# Altium PCB breakout_arduino.PcbDoc
Units mm, origin at the board's own origin, x right, y up, seen from the top; angles counter-clockwise.
Board outline 68.54 x 53.38 mm, 2 copper layers (Top Layer, Bottom Layer), stack 0.325 mm thick; 12 components, 56 nets, 145 pads, 93 vias.
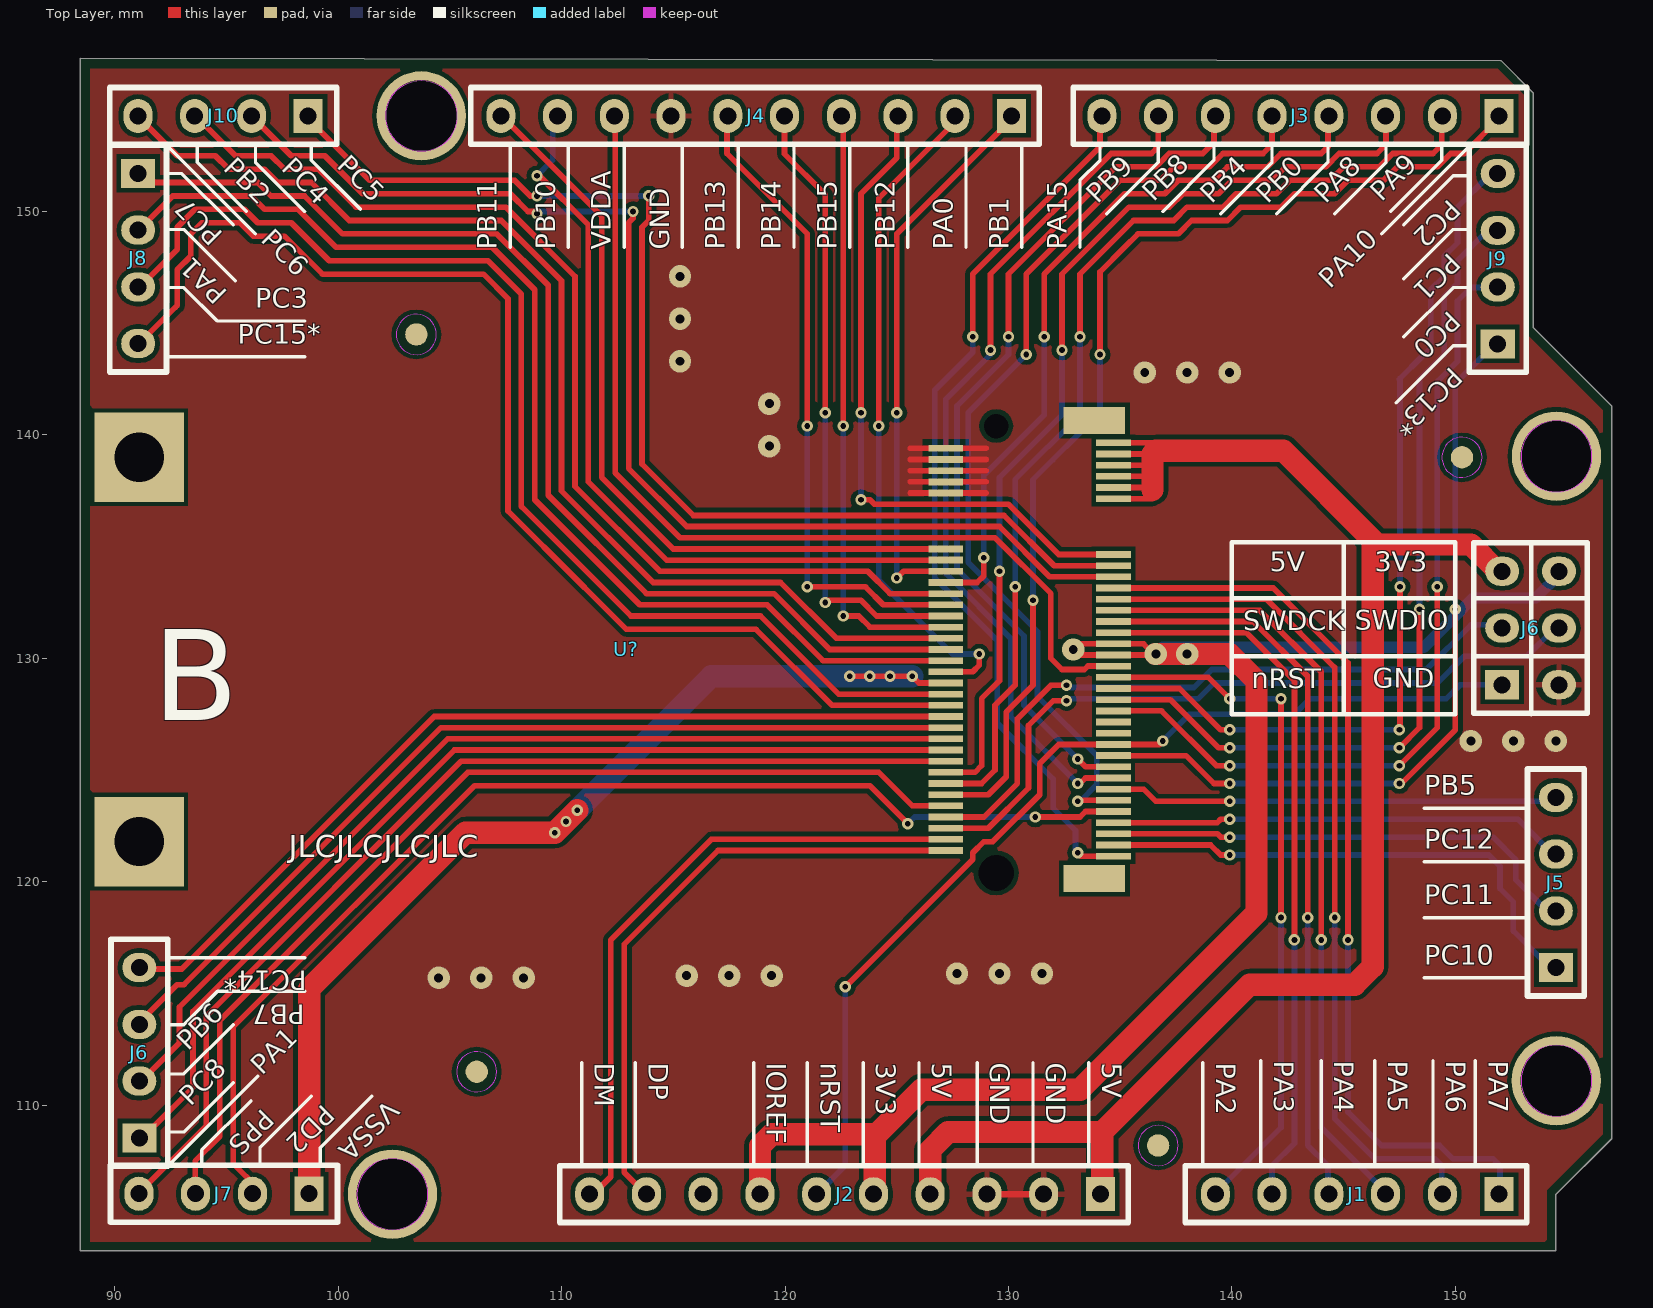
[diagram p0: Top Layer view]
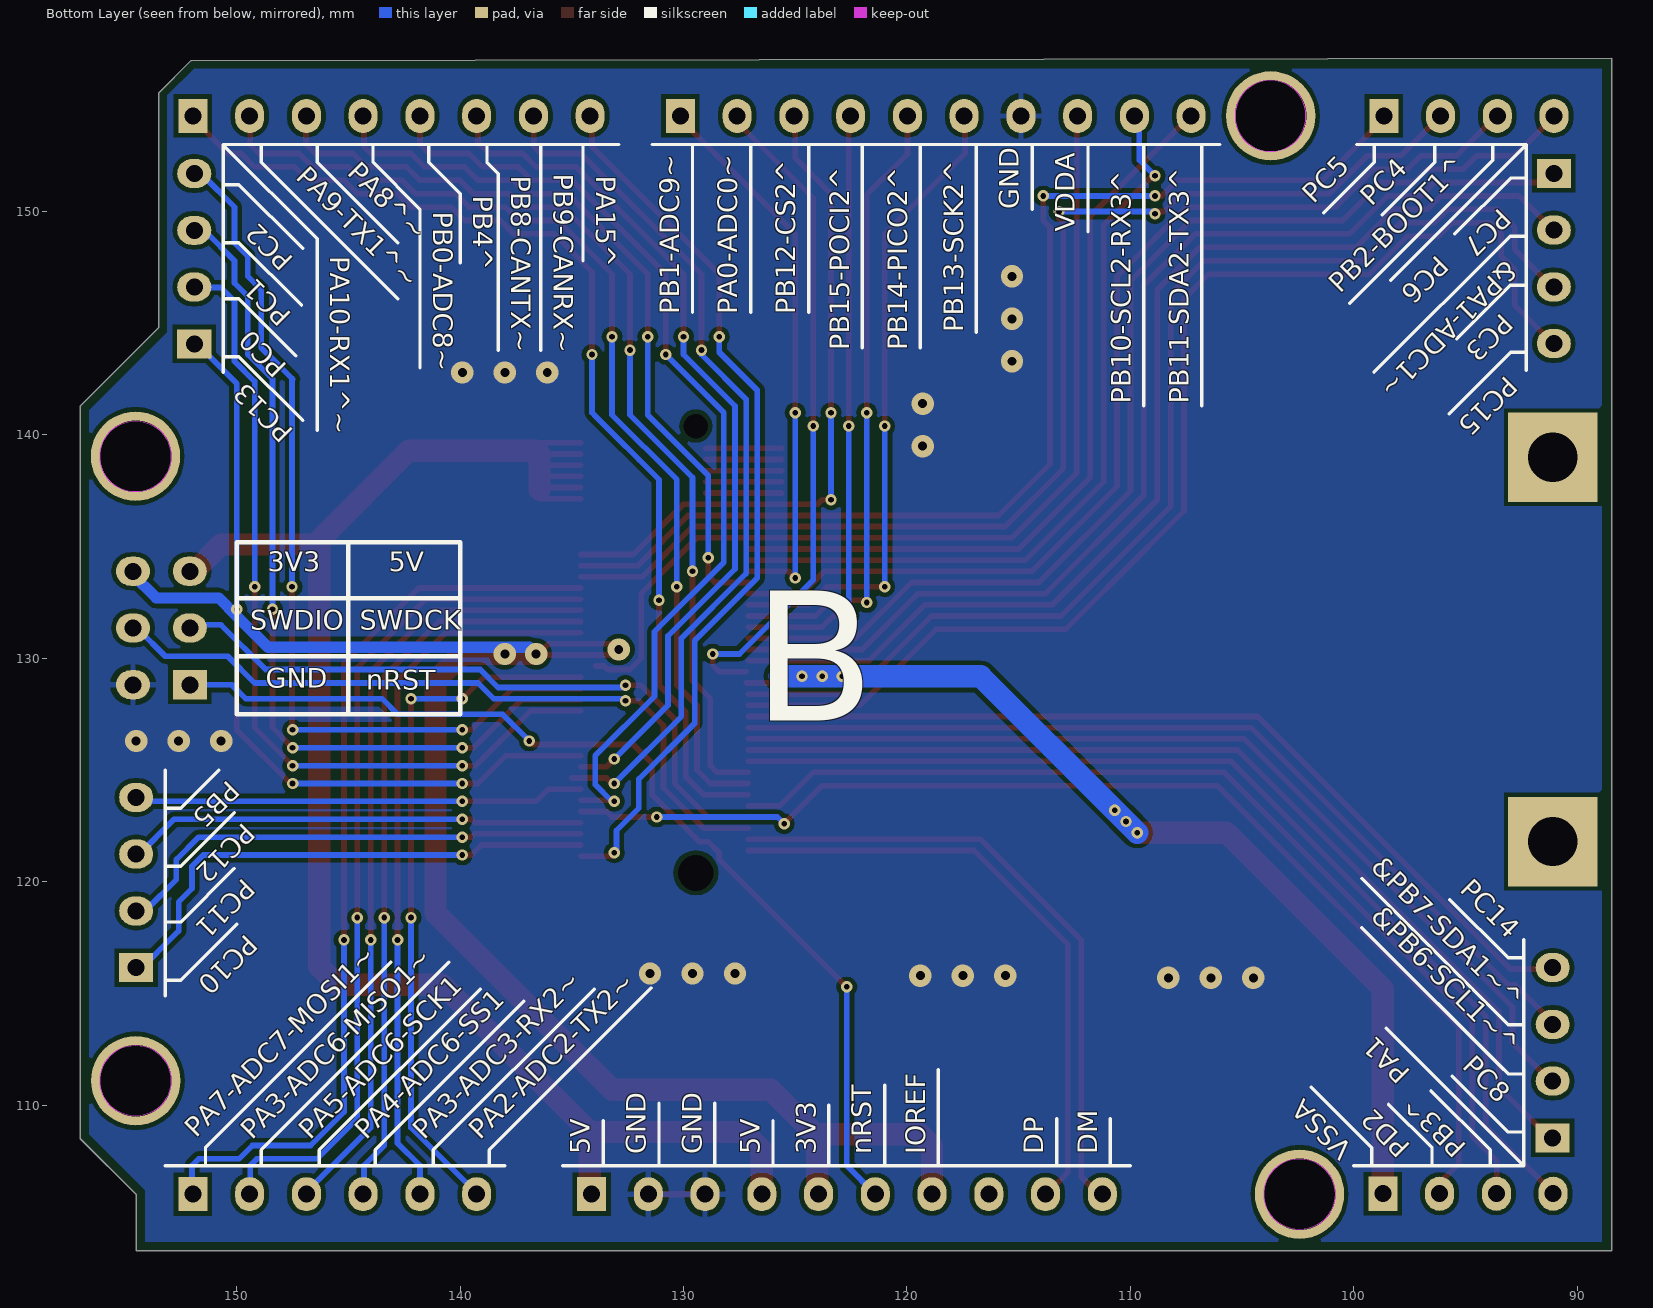
[diagram p1: Bottom Layer view, seen from below]

## Layer stack, top to bottom
Top Solder: solder mask 0.0102, Solder Resist, Dk 3.5
Top Layer: signal copper 0.0356
Dielectric 1: core 0.254, FR-4, Dk 4.2
Bottom Layer: signal copper 0.0356
Bottom Solder: solder mask 0.0102, Solder Resist, Dk 3.5

## Board outline
88.46,103.48 88.46,156.858 152.046,156.755 153.5,155.299 153.5,144.8 157,141.3 157,108.5 154.5,106 154.5,103.48
cut-out: 103.73,152.692 cw(c103.73,154.28) 102.143,154.28 cw(c103.73,154.28) 103.73,155.867 cw(c103.73,154.28) 105.318,154.28 cw(c103.73,154.28)
cut-out: 100.843,106.02 ccw(c102.43,106.02) 102.43,104.432 ccw(c102.43,106.02) 104.018,106.02 ccw(c102.43,106.02) 102.43,107.607 ccw(c102.43,106.02)
cut-out: 152.943,111.1 ccw(c154.53,111.1) 154.53,109.512 ccw(c154.53,111.1) 156.118,111.1 ccw(c154.53,111.1) 154.53,112.687 ccw(c154.53,111.1)
cut-out: 152.943,139.04 ccw(c154.53,139.04) 154.53,137.452 ccw(c154.53,139.04) 156.118,139.04 ccw(c154.53,139.04) 154.53,140.627 ccw(c154.53,139.04)

## Design rules (kind name [scope] priority, off if disabled: settings)
Clearance [All] p1: gap=0.2 ignorepadtopadclearanceinfootprint=FALSE except(0: Arc-Hole Track-Hole SMDPad-Hole THPad-Hole Via-Hole Fill-Hole Poly-Hole Region-Hole Text-Hole)
PolygonConnect [All] p1: thpad.connectstyle=Relief thpad.reliefconductorwidth=0.254 thpad.reliefentries=4 thpad.polygonreliefangle="90 Angle" thpad.airgapwidth=0.254 smdpad.connectstyle=Relief smdpad.reliefconductorwidth=0.254 smdpad.reliefentries=4 smdpad.polygonreliefangle="90 Angle" smdpad.airgapwidth=0.254 via.connectstyle=Direct via.reliefconductorwidth=0.254 via.reliefentries=4 via.polygonreliefangle="90 Angle" via.airgapwidth=0.254
RoutingVias [All] p1: holewidth=0.711 width=1.27 viastyle="Through Hole" minholewidth=0.711 minwidth=1.27 maxholewidth=0.711 maxwidth=1.27
SolderMaskExpansion [All] p1: expansion=0.102
Width [All] p1: maxlimit=1 minlimit=0.254 preferedwidth=0.254
30 further rules are at their usual default settings.

## Classes and differential pairs
component class v0: J1 J2 J3 J4 J5 J6 J7 J8 J9 J10 U?

## Components (designator, comment, footprint, x,y, rotation, side; value= is the part's Value field where it differs from the comment)
J1 "HEADER_6P1_MALE_TH" HEADER_6P1_MALE_TH 145.59,106.02 r180 top
J2 "HEADER_10P1_MALE_TH" HEADER_10P1_MALE_TH 122.66,106.02 r180 top
J3 "HEADER_8P1_MALE_TH" HEADER_8P1_MALE_TH 143.04,154.28 r180 top
J4 "HEADER_10P1_MALE_TH" HEADER_10P1_MALE_TH 118.68,154.28 r180 top
J5 "HEADER_4P1_MALE_TH" HEADER_4P1_MALE_TH 154.5,119.97 r90 top
J6 "HEADER_4P1_MALE_TH" HEADER_4P1_MALE_TH 91.1,112.35 r90 top
J6 "HEADER_6P2_MALE_TH" HEADER_6P2_MALE_TH 153.37,131.36 r90 top
J7 "HEADER_4P1_MALE_TH" HEADER_4P1_MALE_TH 94.89,106.04 r180 top
J8 "HEADER_4P1_MALE_TH" HEADER_4P1_MALE_TH 91.05,147.9 r270 top
J9 "HEADER_4P1_MALE_TH" HEADER_4P1_MALE_TH 151.9,147.89 r90 top
J10 "HEADER_4P1_MALE_TH" HEADER_4P1_MALE_TH 94.85,154.28 r180 top
U? "BITSNAP_GF_B" BITSNAP_CPU_NGFF_B 131.2,130.4 r90 top

## Footprints (in the part's own frame and the unit in brackets; to place one, negate y for a bottom-side part, rotate by r counter-clockwise, add the part's x,y. Pads: shape width x height; smd on the part's side, far side on the other; paste and mask are expansions set on the pad)
BITSNAP_CPU_NGFF_B [mm] "Bitsnap, NGFF B KEY, TE 2199119-3"
  rect 0.3x1.55 smd: 1(9.25,-3.5) 2(9,4) 3(8.75,-3.5) 4(8.5,4) 5(8.25,-3.5) 6(8,4) 7(7.75,-3.5) 8(7.5,4) 9(7.25,-3.5) 10(7,4) 11(6.75,-3.5) 20(4.5,4) 21(4.25,-3.5) 22(4,4) 23(3.75,-3.5) 24(3.5,4) 25(3.25,-3.5) 26(3,4) 27(2.75,-3.5) 28(2.5,4) 29(2.25,-3.5) 30(2,4) 31(1.75,-3.5) 32(1.5,4) 33(1.25,-3.5) 34(1,4) 35(0.75,-3.5) 36(0.5,4) 37(0.25,-3.5) 38(0,4) 39(-0.25,-3.5) 40(-0.5,4) 41(-0.75,-3.5) 42(-1,4) 43(-1.25,-3.5) 44(-1.5,4) 45(-1.75,-3.5) 46(-2,4) 47(-2.25,-3.5) 48(-2.5,4) 49(-2.75,-3.5) 50(-3,4) 51(-3.25,-3.5) 52(-3.5,4) 53(-3.75,-3.5) 54(-4,4) 55(-4.25,-3.5) 56(-4.5,4) 57(-4.75,-3.5) 58(-5,4) 59(-5.25,-3.5) 60(-5.5,4) 61(-5.75,-3.5) 62(-6,4) 63(-6.25,-3.5) 64(-6.5,4) 65(-6.75,-3.5) 66(-7,4) 67(-7.25,-3.5) 68(-7.5,4) 69(-7.75,-3.5) 70(-8,4) 71(-8.25,-3.5) 72(-8.5,4) 73(-8.75,-3.5) 74(-9,4) 75(-9.25,-3.5)
  round 0 hole 1.6 unplated: 76(-10,1.75)
  round 0 hole 1.1 unplated: 76(10,1.75)
  rect 1.2x2.75 smd: M(-10.25,-2.65) M(10.25,-2.65)
  rect 4x4 hole 2.2: M(-8.6,40.1) M(8.6,40.1)
  Bottom Layer pour cut-out: -17.2,17.6
  Bottom Layer pour cut-out: -17.2,17.6
  body extent -10.99,-4.1 11.01,42.5, height 5.46
HEADER_4P1_MALE_TH [mil] "Through Hole Header 4 Pin 1 Row 2.54mm"
  rect 51.18x60 hole 30: 1(-150,0)
  oval 51.18x60 hole 30: 2(-50,0) 3(50,0) 4(150,0)
  silkscreen extent -200,-50 200,50, body extent -200,-50 200,50, height 336
HEADER_6P1_MALE_TH [mm] "Through Hole Header 6 Pin 1 Row 2.54mm"
  rect 1.3x1.524 hole 0.762: 1(-6.37,0)
  oval 1.3x1.524 hole 0.762: 2(-3.83,0) 3(-1.29,0) 4(1.25,0) 5(3.79,0) 6(6.33,0)
  silkscreen extent -7.61,-1.27 7.67,1.27, body extent -7.61,-1.27 7.63,1.27, height 8.54
HEADER_6P2_MALE_TH [mil] "Through Hole Header 6 Pin 2 Row 2.54mm"
  rect 51.18x60 hole 30: 1(-100,50)
  oval 51.18x60 hole 30: 2(-100,-50) 3(0,50) 4(0,-50) 5(100,50) 6(100,-50)
  silkscreen extent -150,-100 150,100, body extent -150,-100 150,100, height 336
HEADER_8P1_MALE_TH [mil] "Through Hole Header 8 Pin 1 Row 2.54mm"
  rect 51.18x60 hole 30: 1(-351.19,-0.01)
  oval 51.18x60 hole 30: 2(-251.19,-0.01) 3(-151.19,-0.01) 4(-51.19,-0.01) 5(48.81,-0.01) 6(148.81,-0.01) 7(248.81,-0.01) 8(348.81,-0.01)
  silkscreen extent -400,-50 399,50, body extent -400,-50 400,50, height 336
HEADER_10P1_MALE_TH [mm] "Through Hole Header 10 Pin 1 Row 2.54mm"
  rect 1.3x1.524 hole 0.762: 1(-11.46,0)
  oval 1.3x1.524 hole 0.762: 2(-8.92,0) 3(-6.38,0) 4(-3.84,0) 5(-1.3,0) 6(1.24,0) 7(3.78,0) 8(6.32,0) 9(8.86,0) 10(11.4,0)
  silkscreen extent -12.7,-1.27 12.74,1.27, body extent -12.7,-1.27 12.7,1.27, height 8.54

## Part data
J1 J6: "HEADER, 2.54MM, THT, 6PIN 1ROW"
J2 J4: "HEADER, 2.54MM, THT, 10PIN 1ROW"
J3: "HEADER, 2.54MM, THT, 8PIN 1ROW"
J5 J6 J7 J8 J9 J10: "HEADER, 2.54MM, THT, 4PIN 1ROW"
U?: "U - IC - Bitsnap CPU, NGFF B Key", LCSC Part #=C2761344, Manufacturer=Foxconn, Manufacturer P/N=AS0BC21-S30BB-7H

## Free pads (board coordinates)
  round 1 smd mask+0.5: F(103.5,144.5) F(106.2,111.5) F(136.7,108.2) F(150.3,139)
  round 4 hole 3.2: M(102.43,106.02) M(103.72,154.28) M(154.52,111.1) M(154.53,139.05)

## Via types
v1: diameter 0.508, hole 0.254, Top Layer to Bottom Layer, tented both sides, 70 vias
v2: diameter 1, hole 0.4, Top Layer to Bottom Layer, tented both sides, 23 vias

## Nets (pads, with @x,y where several pads share a name; then routed paths per layer and width w, separated by ;. In a path a pad name is that pad's centre, name@x,y a point inside that pad or via, vN(x,y) a via of type N, cw(c..) or ccw(c..) an arc to the next point about the centre after c; other vN are vias at no path point)
&^~PB6_SCL1: J6.2@91.1,111.08 U?.54 | length 43.1
  Top Layer w0.254: J6.2@91.2,111.1 92.9,112.8 92.9,114.4 104.9,126.4 ; 105,126.4 U?.54@127.1,126.4
&^~PB7_SDA1: J6.3@91.1,113.62 U?.52 | length 41.6
  Top Layer w0.254: J6.3@91,113.6 92.8,115.4 93.1,115.4 104.6,126.9 U?.52@127.1,126.9
&~PA1_ADC1: J8.2 U?.40 | length 50.7
  Top Layer w0.254: J8.2@91.1,149.2 92.6,150.7 96.1,150.7 96.7,150.1 98.2,150.1 99.9,148.4 106.9,148.4 108.8,146.5 108.8,138.7 108.8,137.1 113.5,132.4 119.2,132.4 121.7,129.9 124,129.9 U?.40@127.1,129.9
^PA15: J3.8 U?.75 | length 41
  Top Layer w0.254: v1(128.4,144.4) 128.4,146.4 ; 128.4,145.4 128.4,147.2 134.1,152.9 J3.8@134.1,154.3 ; v1@133.15,121.25 133.25,121.15 U?.75@134.6,121.15
  Bottom Layer w0.254: v1(128.4,144.4) 128.4,143.7 126.7,142 126.7,133.6 129.5,130.8 129.5,127.1 132,124.6 132,123.4 ; 132,123.3 133,122.3 v1@133,121.4
  other v1: 133.1,121.3
^PB2_BOOT1: J10.3 U?.28 | length 47.7
  Top Layer w0.254: J10.3@93.7,154.2 95.4,152.5 97,152.5 97.6,151.9 99.1,151.9 100.8,150.2 107.5,150.2 110.6,147.1 110.6,137.7 114.4,133.9 123.7,133.9 124.7,132.9 U?.28@127.1,132.9
^PB4: J3.5 U?.65 | length 44.2
  Top Layer w0.254: v1@130.8,143.8 130.8,146.4 ; 130.8,145.7 130.8,147.2 135,151.4 136.8,151.4 137.4,152 139,152 139.6,152.6 141.4,152.6 141.8,153 J3.5 ; v1(133.1,123.6) 133.15,123.65 U?.65@134.6,123.65
  Bottom Layer w0.254: v1(130.8,143.6) 128.2,141 128.2,134.3 131.3,131.2 131.3,128.3 133.95,125.65 133.95,124.35 133.2,123.6 v1(133.1,123.6)
^PB10_SCL2_RX3: J4.9 U?.22 | length 35.1
  Top Layer w0.254: v1@108.8,151.6 v1(108.9,151.6) 109,151.6 111.2,149.4 111.2,137.9 114.7,134.4 U?.22@127.1,134.4 ; J4.9@109.82,154.02 J4.9
  Bottom Layer w0.254: v1(108.9,151.6) 109.6,152.3 J4.9@109.6,154
^PB11_SDA2_TX3: J4.10 U?.20 | length 34.8
  Top Layer w0.254: J4.10@107.2,154.4 111.8,149.8 111.8,138.1 115,134.9 119.7,134.9 U?.20@127.1,134.9
^PB12_SS2: J4.3 U?.21 | length 30.1
  Top Layer w0.254: v1(123.4,137.1) 123.8,137.1 124,136.9 130,136.9 132.25,134.65 U?.21@134.6,134.65 ; v1(123.4,141) 123.4,150.8 125,152.4 J4.3@125,153.6 ; J4.3@124.8,153.8 J4.3@125,153.6 ; J4.3@125,154 J4.3@125,153.6
  Bottom Layer w0.254: v1(123.4,137.1) 123.4,140.8 123.5,140.9 v1(123.4,141)
^PB13_SCK2: J4.6 U?.30 | length 29
  Top Layer w0.254: J4.6@117.2,154.2 117.4,154 117.4,152.6 121,149 v1(121,140.4) ; v1(121,133.2) 123.6,133.2 124.4,132.4 U?.30@127.1,132.4
  Bottom Layer w0.254: v1(121,133.2) v1(121,140.4)
^PB14_MISO2: J4.5 U?.32 | length 28.2
  Top Layer w0.254: J4.5 119.98,152.58 121.8,150.76 v1(121.8,141) ; v1(121.8,132.5) 121.9,132.6 123.4,132.6 124.1,131.9 U?.32@127.1,131.9
  Bottom Layer w0.254: v1(121.8,132.5) 121.8,136.7 v1(121.8,141)
^PB15_MOSI2: J4.4 U?.34 | length 26.8
  Top Layer w0.254: J4.4@122.5,153.8 122.6,153.7 v1(122.6,140.4) ; J4.4@122.52,154.12 J4.4 ; v1(122.6,131.9) 123.3,131.9 123.8,131.4 U?.34@127.1,131.4
  Bottom Layer w0.254: v1(122.6,131.9) v1(122.6,140.4)
^~PA8: J3.3 U?.60 | length 43
  Top Layer w0.254: U?.60@127.1,124.9 128.5,124.9 128.8,125.2 128.8,128.2 129.6,129 v1(129.6,133.9) ; v1(132.4,143.8) 132.4,147.2 135.4,150.2 137.2,150.2 137.8,150.8 139.4,150.8 140,151.4 141.8,151.4 142.4,152 144.2,152 144.8,152.6 146.5,152.6 146.9,153 J3.3@146.9,153.8
  Bottom Layer w0.254: v1(129.6,133.9) 129.6,138.1 132.4,140.9 v1(132.4,143.8)
^~PA9_TX1: J3.2 U?.62 | length 46
  Top Layer w0.254: U?.62@127.1,124.4 128.8,124.4 129.4,125 129.4,127.9 130.3,128.8 v1(130.3,133.2) ; v1(133.2,144.4) 133.2,147.2 135.6,149.6 137.4,149.6 138,150.2 139.6,150.2 140.2,150.8 142,150.8 142.6,151.4 144.4,151.4 145,152 146.6,152 147.2,152.6 149,152.6 149.4,153 J3.2@149.4,154.1
  Bottom Layer w0.254: v1(130.3,133.2) 130.3,138 133.2,140.9 v1(133.2,144.4)
^~PA10_RX1: J3.1 U?.64 | length 51.1
  Top Layer w0.254: U?.64@127.1,123.9 129.1,123.9 129.9,124.7 129.9,127.6 131.1,128.8 v1(131.1,132.6) ; v1(134.1,143.6) 134.1,147.3 135.2,148.4 135.8,149 137.6,149 138.2,149.6 139.8,149.6 140.4,150.2 142.2,150.2 142.8,150.8 144.6,150.8 145.2,151.4 146.8,151.4 147.4,152 149.2,152 149.8,152.6 150.4,152.6 151.96,154.16 J3.1
  Bottom Layer w0.254: v1(131.1,132.6) 131.1,138 134,140.9 ; 132,138.9 134.1,141 v1(134.1,143.6)
GND: J2.2 J2.3 J4.7 J6.2@154.64,128.82 U?.2 U?.4 U?.6 U?.8 U?.10 | length 24.6
  Top Layer w0.254: 125.6,137.4 U?.10@127.8,137.4 ; 125.6,137.9 U?.8@127.8,137.9 ; 125.6,138.4 U?.6@127.8,138.4 ; 125.6,138.9 U?.4@127.8,138.9 ; 125.6,139.4 U?.2@127.8,139.4 ; U?.10@126.8,137.4 129,137.4 ; U?.8@126.8,137.9 129,137.9 ; U?.6@126.8,138.4 129,138.4 ; U?.4@126.8,138.9 129,138.9 ; U?.2@126.8,139.4 129,139.4
  Top Layer w0.3: J2.3@129.1,106.02 131.32,106.02 J2.2@131.6,106.3
  other v2: 104.5,115.7 106.4,115.7 108.3,115.7 115.6,115.8 117.5,115.8 119.4,115.8 127.7,115.9 129.6,115.9 131.5,115.9 150.7,126.3 152.6,126.3 154.5,126.3 119.3,139.5 119.3,141.4 136.1,142.8 138,142.8 139.9,142.8 115.3,143.3 115.3,145.2 115.3,147.1
NRST: J2.6 J6.1@152.1,128.82 U?.55 | length 45.8
  Top Layer w0.254: v1(122.7,115.3) 128.4,121 128.4,121.3 128.9,121.8 129.3,121.8 131.4,123.9 131.4,125.3 132.25,126.15 U?.55 136.75,126.15 v1(136.9,126.3) v1@136.9,126.2
  Bottom Layer w0.254: J2.6 122.7,107.3 v1(122.7,115.3) ; v1(136.9,126.3) 138.1,127.5 142.8,127.5 143.5,128.2 149.6,128.2 150.22,128.82 J6.1@152,128.82
PA1: J7.4
PA4_ADC4_SS1: J1.4 U?.33 | length 33.4
  Top Layer w0.254: U?.33@134.6,131.65 140.95,131.65 143.4,129.2 143.4,128.1 v1(143.4,118.4)
  Bottom Layer w0.254: v1@143.4,118.5 143.4,108.2 144.3,107.3 J1.4@144.3,106.2 ; J1.4@144.3,106.1 J1.4@144.4,106
PA5_ADC5_SCK1: J1.3 U?.31 | length 36.5
  Top Layer w0.254: U?.31@134.6,132.15 141.25,132.15 144,129.4 144,128.2 ; v1@144,117.5 144,128.3
  Bottom Layer w0.254: 144,111.7 144,110.2 ; v1(144,117.4) 144,110.2 ; J1.3@146.9,106.2 146.8,106.2 144,109 144,110.2
PB5: J5.4 U?.63 | length 20
  Top Layer w0.254: U?.63@134.6,124.15 U?.63 136.05,124.15 136.6,123.6 v1(139.9,123.6)
  Bottom Layer w0.254: v1(139.9,123.6) J5.4@154.4,123.6
PC0: J9.2 U?.49 | length 38.9
  Top Layer w0.254: U?.49@134.6,127.65 U?.49 136.85,127.65 139.3,125.2 v1(139.9,125.2) ; v1(147.5,125.2) 149.2,126.9 ; 149.2,127.4 149.2,126.9 ; v1(149.2,133.2) 149.2,126.9
  Bottom Layer w0.254: v1(139.9,125.2) v1(147.5,125.2) ; v1(149.2,133.2) 149.2,141.9 ; 149.2,141.8 149.2,142.4 150.1,143.3 150.1,146 150.7,146.6 J9.2@152.4,146.6
PC1: J9.3 U?.47 | length 39.4
  Top Layer w0.254: U?.47@134.6,128.15 U?.47 137.25,128.15 139.4,126 v1(139.9,126) ; v1(147.5,126) 148.4,126.9 v1(148.4,132.2)
  Bottom Layer w0.254: v1(139.9,126) v1(147.5,126) ; v1(148.4,132.2) 148.4,141.8 ; 148.4,141.5 148.4,142.5 149.5,143.6 149.5,146.2 150.1,146.8 150.1,147.8 J9.3@151.4,149.1 ; J9.3@151.5,149.2 J9.3@151.4,149.1 ; J9.3@151.9,149.1 J9.3@151.4,149.1
PC2: J9.4 U?.45 | length 41.6
  Top Layer w0.254: U?.45@134.6,128.65 U?.45 137.65,128.65 139.5,126.8 v1(139.9,126.8) ; v1@147.525,126.8 v1(147.525,133.2) ; J9.4@151.5,151.6 J9.4@151.5,151.7
  Bottom Layer w0.254: v1(139.9,126.8) v1(147.5,126.8) ; 147.5,142.5 147.525,142.525 ; v1(147.525,133.2) 147.525,142.525 ; 148.5,143.5 147.525,142.525 ; J9.4@151.5,151.6 150.1,150.2 150.1,148.6 149.5,148 149.5,147.1 148.9,146.5 148.9,143.9 147.525,142.525
PC3: J8.3 U?.46 | length 52.6
  Top Layer w0.254: J8.3@91.1,146.6 92.8,148.3 92.8,149.3 93.6,150.1 95.8,150.1 96.4,149.5 97.9,149.5 99.6,147.8 106.7,147.8 108.2,146.3 108.2,136.8 113.1,131.9 118.9,131.9 122.4,128.4 U?.46@127.1,128.4
PC4: J10.2 U?.25 | length 54
  Top Layer w0.254: J10.2@96.2,154.2 97.9,152.5 99.4,152.5 101.1,150.8 107.7,150.8 108.5,150 108.8,150 v1(108.9,149.9) ; v1(113.2,150) 113.2,149.7 113,149.5 113,138.5 115.6,135.9 120.3,135.9 129.6,135.9 131.85,133.65 U?.25@134.6,133.65
  Bottom Layer w0.254: v1(108.9,149.9) 109,150 v1(113.2,150)
PC5: J10.1 U?.23 | length 51.8
  Top Layer w0.254: J10.1@98.6,154.2 101.4,151.4 107.9,151.4 108.6,150.7 v1(108.9,150.7) ; v1(113.9,150.7) 113.9,149.6 113.6,149.3 113.6,140.2 113.6,138.7 115.9,136.4 121,136.4 129.8,136.4 132.05,134.15 U?.23@134.6,134.15
  Bottom Layer w0.254: v1(108.9,150.7) v1(113.9,150.7)
PC6: J10.4 U?.36 | length 50.9
  Top Layer w0.254: J10.4@91.3,154 92.8,152.5 94.5,152.5 95.1,151.9 96.7,151.9 97.3,151.3 98.8,151.3 100.5,149.6 107.3,149.6 110,146.9 110,137.5 114.1,133.4 118.8,133.4 119.8,133.4 122.3,130.9 U?.36@127.1,130.9
PC7: J8.1 U?.38 | length 49.9
  Top Layer w0.254: J8.1@91.5,151.6 91.8,151.3 96.4,151.3 97,150.7 98.5,150.7 100.2,149 107.1,149 109.4,146.7 109.4,138 109.4,137.3 113.8,132.9 119.5,132.9 122,130.4 U?.38@127.1,130.4
PC8: J6.1@91.1,108.54 U?.56 | length 45
  Top Layer w0.254: J6.1@91.3,108.6 93.5,110.8 93.5,114.2 105.2,125.9 U?.56@127.1,125.9
PC9: U?.58 | length 46.9
  Top Layer w0.254: 91.1,106.1 94.1,109.1 94.1,114 105.5,125.4 U?.58@127.1,125.4
PC10: J5.1 U?.73 | length 23.7
  Top Layer w0.254: U?.73@134.6,121.65 U?.73 139.05,121.65 139.5,121.2 v1(139.9,121.2)
  Bottom Layer w0.254: v1(139.9,121.2) 151.5,121.2 152,120.7 152,119.7 152.6,119.1 152.6,117.8 154.5,115.9 J5.1@154.5,115.8
PC11: J5.2 U?.71 | length 21.4
  Top Layer w0.254: U?.71@134.6,122.15 U?.71 139.35,122.15 139.5,122 v1(139.9,122)
  Bottom Layer w0.254: v1(139.9,122) 151.7,122 152.7,121 152.7,120.1 J5.2@154.05,118.75
PC12: J5.3 U?.69 | length 20.7
  Top Layer w0.254: U?.69@134.6,122.65 U?.69 139.35,122.65 139.5,122.8 v1(139.9,122.8)
  Bottom Layer w0.254: v1(139.9,122.8) 152.8,122.8 154.43,121.17 J5.3@154.5,121.1
PC13: J9.1 U?.57 | length 34.9
  Top Layer w0.254: U?.57@134.6,125.65 U?.57 137.95,125.65 139.2,124.4 v1(139.9,124.4) ; v1(147.5,124.4) 147.6,124.4 150,126.8 v1@150,132.1
  Bottom Layer w0.254: v1(139.9,124.4) v1(147.5,124.4) ; v1(150,132.2) 150,141.9 ; 150,141.8 150,142.3 151.7,144 J9.1@151.8,144
PC14: J6.4@91.1,116.16 U?.50 | length 40.7
  Top Layer w0.254: J6.4@91.1,116.1 93,116.1 104.3,127.4 U?.50@127.1,127.4
PC15: J8.4 U?.48 | length 55
  Top Layer w0.254: J8.4@91.05,144.05 91.07,144.07 92.7,145.7 92.8,145.8 92.8,147.4 93.4,148 93.4,149 93.9,149.5 95.6,149.5 96.2,148.9 97.6,148.9 99.3,147.2 106.5,147.2 107.6,146.1 107.6,137.6 107.6,136.6 109.7,134.5 ; 109.2,135 112.9,131.3 118.7,131.3 122.1,127.9 U?.48@127.1,127.9
PD2: J7.2 U?.67 | length 52.4
  Top Layer w0.254: J7.2@96.4,106.3 95.3,107.4 95.3,113.5 106.1,124.3 123.8,124.3 v1(125.5,122.6) ; v1(131.2,122.9) 133.2,122.9 133.45,123.15 U?.67@134.6,123.15
  Bottom Layer w0.254: v1(125.5,122.6) 125.8,122.9 v1(131.2,122.9)
PPS: J7.3 U?.66 | length 45.8
  Top Layer w0.254: J7.3@93.6,106.1 93.6,107.5 94.7,108.6 94.7,113.8 105.8,124.9 124.2,124.9 125.7,123.4 U?.66@127.1,123.4
SWDCK: J6.3@152.1,131.36 U?.68 | length 29.8
  Top Layer w0.254: U?.68@127.1,122.9 128.9,122.9 130.4,124.4 130.4,127.3 131.9,128.8 v1(132.6,128.8)
  Bottom Layer w0.254: v1(132.6,128.8) 132.6,128.7 138.3,128.7 139.1,129.5 148.7,129.5 150.7,131.5 J6.3@151.5,131.5
SWDIO: J6.4@154.64,131.36 U?.70 | length 32.7
  Top Layer w0.254: U?.70@127.1,122.4 129.1,122.4 130.9,124.2 130.9,127 132,128.1 v1(132.6,128.1)
  Bottom Layer w0.254: v1(132.6,128.1) 132.6,128.2 138.5,128.2 139.2,128.9 149.2,128.9 150.4,130.1 153.2,130.1 J6.4@154.4,131.3
USB_DM: J2.10 U?.72 | length 28.5
  Top Layer w0.254: J2.10@111.4,106 112.2,106.8 112.2,117.4 116.7,121.9 U?.72@127.1,121.9
USB_DP: J2.9 U?.74 | length 27.7
  Top Layer w0.254: J2.9@113.8,106 112.8,107 112.8,117.2 117,121.4 122.1,121.4 U?.74@127.1,121.4
VCC_3V3: J2.5 J2.7 J6.6 U?.37 U?.39 | length 74.1
  Top Layer w0.254: v2@133.1,130.15 136.55,130.15 v2@136.6,130.1 ; v2@133.1,130.65 U?.37 U?.37@135.05,130.65 ; U?.37@134.6,130.65 136.05,130.65 v2@136.5,130.2
  Top Layer w1: J2.7 118.88,108.18 119.4,108.7 124.1,108.7 ; J2.5@124.02,106.02 124.02,108.62 126.1,110.7 133.2,110.7 141.1,118.6 141.1,129 139.9,130.2 v2(138,130.2) v2(136.6,130.2)
  Bottom Layer w0.5: v2@136.5,130.2 v2(136.6,130.2) 136.9,130.5 148.6,130.5 150,131.9 150.8,132.7 153.6,132.7 J6.6@154.7,133.8
  other v2: 132.9,130.4
VCC_5V: J2.1 J2.4 J6.5 U?.1 U?.3 U?.5 U?.7 U?.9 U?.11 | length 78
  Top Layer w0.254: U?.11@134.6,137.15 136.45,137.15 ; U?.9@134.6,137.65 136.45,137.65 ; U?.7@134.6,138.15 136.45,138.15 ; U?.5@134.6,138.65 136.45,138.65 ; U?.3@134.6,139.15 U?.3 136.45,139.15 ; U?.1@134.6,139.65 136.45,139.65
  Top Layer w1: J2.4 126.5,108 127.3,108.8 134.2,108.8 ; J2.1@134.1,105.8 134.1,106.2 J2.1@134.2,106.3 ; J2.1@134.2,106.1 J2.1@134.2,106.3 ; 136.45,137.55 136.45,137.65 136.45,138.15 136.45,138.65 136.45,139.15 136.6,139.3 142.3,139.3 146.3,135.3 ; J6.5@151.9,133.9 150.7,135.1 146.5,135.1 146.3,135.3 ; J2.1@134.2,106.3 134.2,108.8 ; 134.2,108.8 140.8,115.4 145.5,115.4 146.3,116.2 146.3,135.3
VDDA: J4.8 U?.41 | length 42.8
  Top Layer w0.254: J4.8@112.5,154.1 112.4,154 112.4,138.3 115.3,135.4 129.4,135.4 131.9,132.9 131.9,130 132.4,129.5 133.4,129.5 133.563,129.662 U?.41@133.938,129.662
VSSA: J7.1 U?.44 | length 47.7
  Top Layer w0.254: v1(122.9,129.2) v1(123.8,129.2) v1(124.7,129.2) v1(125.7,129.2) 126,128.9 U?.44
  Top Layer w1: J7.1@98.6,106.1 98.7,106.2 98.7,115.2 105.7,122.2 v1@109.6,122.2 ; v1(109.7,122.2) v1(110.2,122.7) v1(110.7,123.2)
  Bottom Layer w1: v1(109.7,122.2) v1(110.2,122.7) v1(110.7,123.2) 116.7,129.2 v1(122.9,129.2) v1(123.8,129.2) v1(124.7,129.2) v1(125.7,129.2)
~PA0_ADC0: J4.2 U?.42 | length 29.8
  Top Layer w0.254: v1(124.2,140.4) 124.2,150.6 J4.2@127.5,153.9 ; U?.42 128.4,129.4 128.7,129.7 v1(128.7,130.2)
  Bottom Layer w0.254: v1(124.2,140.4) 124.2,133.5 127.5,130.2 v1(128.7,130.2)
~PA2_ADC2_TX2: J1.6 U?.43 | length 31.2
  Top Layer w0.254: U?.43@134.6,129.15 U?.43 138.95,129.15 v1(139.9,128.2) ; v1(142.2,118.4) 142.2,127.4 v1(142.2,128.2)
  Bottom Layer w0.254: J1.6@139.2,106.2 139.4,106.2 142.2,109 v1@142.2,118.2 ; v1(139.9,128.2) v1(142.2,128.2)
~PA3_ADC3_RX2: J1.5 U?.35 | length 32.6
  Top Layer w0.254: U?.35@134.6,131.15 140.65,131.15 142.8,129 v1(142.8,117.4)
  Bottom Layer w0.254: J1.5@141.8,106.3 141.8,107.3 142.8,108.3 142.8,109.3 ; v1@142.7,117.5 v1(142.8,117.4) 142.8,109
~PA6_ADC6_MISO1: J1.2 U?.29 | length 39.7
  Top Layer w0.254: U?.29@134.6,132.65 141.55,132.65 144.6,129.6 144.6,128.3 v1(144.6,118.4)
  Bottom Layer w0.254: 144.6,109.7 v1(144.6,118.4) ; 144.6,110.9 144.6,109.4 146.4,107.6 149.1,107.6 149.4,107.3 J1.2@149.4,105.9
~PA7_ADC7_MOSI1: J1.1 U?.27 | length 41.3
  Top Layer w0.254: U?.27@134.6,133.15 141.85,133.15 145.2,129.8 145.2,129 ; v1(145.2,117.4) 145.2,129.1
  Bottom Layer w0.254: v1(145.2,117.4) 145.2,109.7 146.7,108.2 149.3,108.2 149.9,107.6 151.7,107.6 151.8,107.5 152,107.3 J1.1@152,106
~PB0_ADC8: J3.4 U?.26 | length 32.8
  Top Layer w0.254: U?.26@127.1,133.4 128.6,133.4 128.9,133.7 v1(128.9,134.5) ; v1(131.6,144.4) 131.6,147.2 135.2,150.8 137,150.8 137.6,151.4 139.2,151.4 139.8,152 141.6,152 142.2,152.6 144,152.6 144.3,152.9 J3.4@144.3,154.3
  Bottom Layer w0.254: v1(128.9,134.5) 128.9,138.2 131.6,140.9 v1@131.6,144.2
~PB1_ADC9: J4.1 U?.24 | length 24.4
  Top Layer w0.254: v1(125,141) 125,149 J4.1@129.9,153.9 ; v1@125.1,133.7 125.3,133.9 U?.24@127.1,133.9
  Bottom Layer w0.254: v1(125,133.6) v1(125,141)
~PB8_CANTX: J3.6 U?.59 | length 40.6
  Top Layer w0.254: v1(130,144.4) 130,146.4 ; 130,145.3 130,147.2 134.8,152 136.6,152 137.2,152.6 138.7,152.6 139.2,153.1 J3.6@139.2,154.4 ; v1(133.1,125.5) 133.45,125.15 U?.59@134.6,125.15
  Bottom Layer w0.254: v1(130,144.4) 130,143.6 127.7,141.3 127.7,134 130.7,131 130.7,127.9 v1(133.1,125.5)
~PB9_CANRX: J3.7 U?.61 | length 41.9
  Top Layer w0.254: v1(129.2,143.8) 129.2,146.4 ; 129.2,145 129.2,147.2 134.6,152.6 136.4,152.6 136.7,152.9 J3.7@136.7,154.3 ; v1(133.1,124.4) 133.2,124.4 133.45,124.65 ; U?.61@134.6,124.65 133.45,124.65 ; U?.61@135,124.65 133.45,124.65
  Bottom Layer w0.254: v1(129.2,143.8) 129.2,143.6 127.2,141.6 127.2,133.8 130.1,130.9 130.1,127.4 v1(133.1,124.4)
pads on no net: J2.8 U?.51 U?.53 U?.76 U?.M

## Polygon pours and split planes (outlines as drawn)
GND on Bottom Layer "Bottom Layer-GND" (solid, pour order 6): 88.9,156.4 151.9,156.4 153.1,155.2 153.1,144.6 156.6,141.1 156.6,108.7 154.1,106.2 154.1,103.9 88.9,103.9
GND on Top Layer "Top Layer-GND" (solid, pour order 8): 88.9,156.4 151.9,156.4 153.2,155.1 153.2,144.5 156.6,141.1 156.6,108.7 154.1,106.2 154.1,103.9 88.9,103.9

## Keep-outs
Top Layer:
  circle w0: c136.7,108.2 r0.9
  circle w0: c150.3,139 r0.9
  circle w0: c103.5,144.5 r0.9
  circle w0: c106.2,111.5 r0.9

## Silkscreen, mask and mechanical layers (free items; w line width, h text height)
Top Overlay:
  pour cut-out: 136.7,107.289 ccw(c136.7,108.189) 137.6,108.189 ccw(c136.7,108.189) 136.7,109.089 ccw(c136.7,108.189) 135.8,108.189 ccw(c136.7,108.189)
  pour cut-out: 150.3,138.089 ccw(c150.3,138.989) 151.2,138.989 ccw(c150.3,138.989) 150.3,139.889 ccw(c150.3,138.989) 149.4,138.989 ccw(c150.3,138.989)
  pour cut-out: 103.5,143.589 ccw(c103.5,144.489) 104.4,144.489 ccw(c103.5,144.489) 103.5,145.389 ccw(c103.5,144.489) 102.6,144.489 ccw(c103.5,144.489)
  pour cut-out: 106.2,110.589 ccw(c106.2,111.489) 107.1,111.489 ccw(c106.2,111.489) 106.2,112.389 ccw(c106.2,111.489) 105.3,111.489 ccw(c106.2,111.489)
  lines w0.15: 92.3,143.5 98.5,143.5 ; 92.3,151.7 93,151.7 95.3,149.4 ; 92.4,108.8 93.1,108.8 95.3,111 ; 92.4,111.4 93.1,111.4 95.3,113.6 ; 92.4,113.6 93.1,113.6 94.6,115.1 98.5,115.1 ; 92.4,116.6 98.5,116.6 ; 92.4,146.6 93.1,146.6 94.6,145.1 98.5,145.1 ; 92.4,149.2 93.1,149.2 95.4,146.9 ; 92.4,152.9 96.3,149 ; 92.5,107.4 96.4,111.3 ; 93.7,152.9 93.7,152.2 95.9,150 ; 93.9,107.4 93.9,108 96.1,110.2 ; 96.3,152.9 96.3,152.2 98.5,150 ; 96.5,107.4 96.5,108.1 98.8,110.4 ; 98.8,153 98.8,152.3 101,150.1 ; 99.2,107.4 99.2,108.1 101.5,110.4 ; 107.7,148.4 107.7,153 ; 110.3,148.4 110.3,153 ; 110.9,107.3 110.9,111.9 ; 112.8,148.4 112.8,153 ; 113.3,107.3 113.3,111.9 ; 115.4,148.4 115.4,153 ; 117.9,148.4 117.9,153 ; 118.6,107.3 118.6,111.9 ; 120.4,148.4 120.4,153 ; 121,107.3 121,111.9 ; 122.9,148.4 122.9,153 ; 123.5,107.3 123.5,111.9 ; 125.5,148.4 125.5,153 ; 126,107.3 126,111.9 ; 128.1,148.4 128.1,153 ; 128.6,107.3 128.6,111.9 ; 130.6,148.4 130.6,153 ; 131.1,107.3 131.1,111.9 ; 133.2,148.4 133.2,151.4 134.1,152.3 134.1,153 ; 133.6,107.3 133.6,111.9 ; 134.4,149.9 136.7,152.2 136.7,152.9 ; 136.9,150 139.2,152.3 139.2,153 ; 138.7,107.3 138.7,111.9 ; 139.5,149.9 141.8,152.2 141.8,152.9 ; 141.3,107.4 141.3,112 ; 142,149.9 144.3,152.2 144.3,152.9 ; 144,107.4 144,112 ; 144.6,149.9 146.9,152.2 146.9,152.9 ; 146.4,107.4 146.4,112 ; 146.7,149 150.6,152.9 ; 147.1,150 149.4,152.3 149.4,153 ; 147.35,141.45 149.9,144 150.6,144 ; 147.7,144.4 149.9,146.6 150.6,146.6 ; 147.7,147 149.9,149.2 150.6,149.2 ; 147.7,149.4 149.9,151.6 150.6,151.6 ; 148.6,115.7 153.2,115.7 ; 148.6,118.4 153.2,118.4 ; 148.6,120.9 153.2,120.9 ; 148.6,123.3 153.2,123.3 ; 149,107.4 149,112 ; 150.9,107.4 150.9,112
  lines w0.2: 140,130.1 145,130.1 150,130.1 ; 140,132.7 145,132.7 150,132.7 ; 145,127.5 145,135.1 ; 150.8,132.7 155.9,132.7 ; 150.9,130.1 155.8,130.1 ; 153.4,127.5 153.4,135.1 ; 140,127.5 150,127.5 150,135.2 140,135.2 140,127.5
  text "PC5" at 99.7,151.8 h1.52 r315
  text "PB2" at 94.6,151.7 h1.52 r315
  text "PC4" at 97.2,151.7 h1.52 r315
  text "PC2" at 149.5,150.8 h1.52 r225
  text "PB8" at 136.7,150.2 h1.52 r45
  text "PA9" at 146.9,150.2 h1.52 r45
  text "PB9" at 134.2,150.1 h1.52 r45
  text "PB4" at 139.3,150.1 h1.52 r45
  text "PB0" at 141.8,150.1 h1.52 r45
  text "PA8" at 144.4,150.1 h1.52 r45
  text "PC7" at 95.1,149.2 h1.52 r135
  text "PC6" at 96.3,148.5 h1.52 r315
  text "PC1" at 149.5,148.4 h1.52 r225
  text "PB11" at 107.4,148.3 h1.52 r90
  text "PB10" at 110,148.3 h1.52 r90
  text "VDDA" at 112.5,148.3 h1.52 r90
  text "GND" at 115.1,148.3 h1.52 r90
  text "PB13" at 117.6,148.3 h1.52 r90
  text "PB14" at 120.1,148.3 h1.52 r90
  text "PB15" at 122.6,148.3 h1.52 r90
  text "PB12" at 125.2,148.3 h1.52 r90
  text "PA0" at 127.8,148.3 h1.52 r90
  text "PB1" at 130.3,148.3 h1.52 r90
  text "PA15" at 132.9,148.3 h1.52 r90
  text "PA1" at 95.3,146.6 h1.52 r135
  text "PA10" at 144.6,146.3 h1.52 r45
  text "PC0" at 149.5,145.8 h1.52 r225
  text "PC3" at 96.3,145.4 h1.52
  text "PC15*" at 95.5,143.8 h1.52
  text "PC13*" at 149.6,143.3 h1.52 r225
  text "5V" at 141.7,133.6 h1.52
  text "3V3" at 146.4,133.6 h1.52
  text "SWDCK" at 140.5,130.979 h1.52
  text "SWDIO" at 145.5,131 h1.52
  text "GND" at 146.3,128.4 h1.52
  text "nRST" at 140.9,128.379 h1.52
  text "B" at 91.7,125.9 h7
  text "PB5" at 148.6,123.6 h1.52
  text "PC12" at 148.6,121.2 h1.52
  text "JLCJLCJLCJLC" at 97.8,121.1 h1
  text "PC11" at 148.6,118.7 h1.52
  text "PC14*" at 98.6,116.3 h1.52 r180
  text "PC10" at 148.6,116 h1.52
  text "PB7" at 98.5,114.8 h1.52 r180
  text "PB6" at 93.5,112.2 h1.52 r45
  text "PA3" at 141.6,112 h1.52 r270
  text "PA4" at 144.3,112 h1.52 r270
  text "PA5" at 146.7,112 h1.52 r270
  text "PA6" at 149.3,112 h1.52 r270
  text "PA7" at 151.2,112 h1.52 r270
  text "DM" at 111.2,111.9 h1.52 r270
  text "DP" at 113.6,111.9 h1.52 r270
  text "IOREF" at 118.9,111.9 h1.52 r270
  text "nRST" at 121.3,111.9 h1.52 r270
  text "3V3" at 123.8,111.9 h1.52 r270
  text "5V" at 126.3,111.9 h1.52 r270
  text "GND" at 128.9,111.9 h1.52 r270
  text "GND" at 131.4,111.9 h1.52 r270
  text "5V" at 133.9,111.9 h1.52 r270
  text "PA2" at 139,111.9 h1.52 r270
  text "PA1" at 96.8,111.1 h1.52 r45
  text "VSSA" at 102,110.5 h1.52 r225
  text "PD2" at 99.1,110.3 h1.52 r225
  text "PPS" at 96.4,110.1 h1.52 r225
  text "PC8" at 93.6,109.7 h1.52 r45
Bottom Overlay:
  lines w0.15: 92.281,142.9 92.281,153 ; 92.281,143.7 92.981,143.7 95.581,141.1 ; 92.281,146.7 92.981,146.7 ; 92.281,148.9 92.981,148.9 ; 92.281,151.5 92.981,151.5 95.481,149 ; 92.4,108.8 93.1,108.8 95.6,111.3 ; 92.4,111.4 93.1,111.4 99.45,117.75 ; 92.4,113.6 93.1,113.6 99.25,119.75 ; 92.4,116.6 93.1,116.6 95.7,119.2 ; 92.4,117.4 92.4,107.3 ; 93,146.7 95.4,144.3 ; 93,148.9 99.1,142.8 ; 93.181,152.1 98.356,146.925 ; 93.3,111.6 99.65,117.95 ; 93.3,113.8 99.65,120.15 ; 93.781,142.9 95.731,140.95 ; 93.781,152.9 93.781,152.3 96.431,149.65 ; 93.9,107.4 93.9,108 96.55,110.65 ; 95.681,150.4 100.181,145.9 ; 96.381,152.9 96.381,152.2 98.331,150.25 ; 96.5,107.4 96.5,108.1 98.45,110.05 ; 96.781,151.8 98.731,149.85 ; 97.456,147.825 92.281,153 ; 98.55,113.45 92.4,107.3 ; 99.081,152.9 99.081,152.2 101.341,149.941 ; 99.2,107.4 99.2,108.1 101.9,110.8 ; 99.881,153 92.281,153 ; 100,107.3 92.4,107.3 ; 106,153 131.4,153 ; 106.8,141.3 106.8,153 ; 109.4,141.3 109.4,153 ; 110,107.3 135.4,107.3 ; 110.9,107.4 110.9,109.4 ; 111.9,149.1 111.9,153 ; 113.3,107.4 113.3,109.4 ; 114.4,150.1 114.4,153 ; 116.9,144.6 116.9,153 ; 118.6,107.3 118.6,111.6 ; 119.4,143.9 119.4,153 ; 121,107.3 121,110.9 ; 122,143.9 122,153 ; 123.5,107.3 123.5,110 ; 124.4,145.5 124.4,152.9 ; 126,107.3 126,109.3 ; 127,145.5 127,152.9 ; 128.6,107.3 128.6,110.1 ; 129.6,145.5 129.6,153 ; 131.1,107.3 131.1,110.1 ; 131.45,115.25 138.7,108 138.7,107.3 ; 132.9,153 150.6,153 150.6,142.8 ; 133.6,107.3 133.6,109.3 ; 134,115.2 141.2,108 141.2,107.3 ; 134.5,147.8 134.5,152.9 ; 136.4,143.8 136.4,153 ; 137.15,114.65 143.8,108 143.8,107.3 ; 138,107.3 153.2,107.3 ; 138.3,143.8 138.3,151.7 138.8,152.2 138.8,152.919 ; 139.1,115.2 146.1,108.2 ; 139.2,115.1 146.3,108 146.3,107.3 ; 140,147.7 140,150.8 141.4,152.2 ; 140.5,116.4 148.9,108 148.9,107.3 ; 141.4,152.219 141.4,152.919 ; 141.8,143 141.8,150.1 143.9,152.2 ; 142.8,146.1 148.9,152.2 ; 142.8,148.6 146.4,152.2 ; 143.1,116.4 151.4,108.1 151.4,107.3 ; 143.9,152.219 143.9,152.919 ; 146.4,140.2 146.4,148.781 150.575,152.956 ; 146.4,152.219 146.4,152.919 ; 147.05,140.65 149.9,143.5 150.6,143.5 ; 147.05,148.35 149.9,151.2 150.6,151.2 ; 147.1,145.8 149.9,148.6 150.6,148.6 ; 147.35,143.55 149.9,146.1 150.6,146.1 ; 148.9,152.219 148.9,152.919 ; 150,118.1 152.5,115.6 153.2,115.6 ; 150.1,120.6 152.5,118.2 153.2,118.2 ; 150.1,123.1 152.5,120.7 153.2,120.7 ; 150.8,125 152.5,123.3 153.2,123.3 ; 153.2,114.9 153.2,125 ; 99.25,119.75 99.25,119.75
  lines w0.2: 140,130.1 145,130.1 150,130.1 ; 140,132.7 145,132.7 150,132.7 ; 145,127.5 145,135.1 ; 140,127.5 150,127.5 150,135.2 140,135.2 140,127.5
  text "PB9-CANRX~" at 136.1,151.7 h1.52 r90
  text "PA15^" at 134.2,151.6 h1.52 r90
  text "PB8-CANTX~" at 138,151.6 h1.52 r90
  text "PA8^~" at 145.3,151.5 h1.52 r45
  text "PA9-TX1^~" at 147.6,151.3 h1.52 r45
  text "PB4^" at 139.7,150.7 h1.52 r90
  text "PC7" at 93.7,150.4 h1.52 r135
  text "PC5" at 101.6,150.1 h1.52 r315
  text "GND" at 114.7,150.1 h1.52 r270
  text "PC4" at 99,150 h1.52 r315
  text "PB0-ADC8~" at 141.5,150 h1.52 r90
  text "VDDA" at 112.2,149.1 h1.52 r270
  text "PC6" at 96.5,148.3 h1.52 r135
  text "&PA1-ADC1~" at 93.4,148.1 h1.52 r135
  text "PC2" at 147.2,148.1 h1.52 r225
  text "PA10-RX1^~" at 146.1,148 h1.52 r90
  text "PB2-BOOT1^" at 100.4,146.1 h1.52 r315
  text "PC3" at 93.6,145.7 h1.52 r135
  text "PC1" at 147.3,145.6 h1.52 r225
  text "PB12-CS2^" at 124.7,145.4 h1.52 r270
  text "PA0-ADC0~" at 127.3,145.4 h1.52 r270
  text "PB1-ADC9~" at 129.9,145.4 h1.52 r270
  text "PB13-SCK2^" at 117.2,144.6 h1.52 r270
  text "PB14-PICO2^" at 119.7,143.8 h1.52 r270
  text "PB15-POCI2^" at 122.3,143.8 h1.52 r270
  text "PC0" at 147.5,143.3 h1.52 r225
  text "PC15" at 93.4,142.9 h1.52 r135
  text "PB11-SDA2-TX3^" at 107.1,141.4 h1.52 r270
  text "PB10-SCL2-RX3^" at 109.7,141.4 h1.52 r270
  text "PC13" at 147.2,140.4 h1.52 r225
  text "5V" at 143.2,133.6 h1.52
  text "3V3" at 148.6,133.6 h1.52
  text "SWDCK" at 144.5,131 h1.52
  text "SWDIO" at 149.4,131 h1.52
  text "GND" at 148.7,128.4 h1.52
  text "nRST" at 144.2,128.3 h1.52
  text "B" at 126.9,125.3 h10
  text "PB5" at 150.6,124.8 h1.52 r135
  text "PC12" at 149.9,122.9 h1.52 r135
  text "&PB7-SDA1~^" at 99.5,120.4 h1.52 r45
  text "PC11" at 149.9,120.4 h1.52 r135
  text "PC14" at 95.5,119.4 h1.52 r45
  text "&PB6-SCL1~^" at 99.5,118.2 h1.52 r45
  text "PC10" at 149.8,117.9 h1.52 r135
  text "PA1" at 97.2,111.7 h1.52 r225
  text "PC8" at 95.4,111.5 h1.52 r45
  text "PB3^" at 94.7,108.4 h1.52 r225
  text "PD2" at 97.2,108.4 h1.52 r225
  text "VSSA" at 99.8,108.3 h1.52 r225
  text "PA7-ADC7-MOSI1~" at 151.6,108.3 h1.52 r315
  text "PA2-ADC2-TX2~" at 138.9,108.2 h1.52 r315
  text "PA3-ADC3-RX2~" at 141.4,108.2 h1.52 r315
  text "PA4-ADC6-SS1" at 144,108.2 h1.52 r315
  text "PA5-ADC6-SCK1" at 146.5,108.2 h1.52 r315
  text "PA3-ADC6-MISO1~" at 149.1,108.2 h1.52 r315
  text "DM" at 111.2,107.8 h1.52 r270
  text "DP" at 113.6,107.8 h1.52 r270
  text "IOREF" at 118.9,107.8 h1.52 r270
  text "nRST" at 121.3,107.8 h1.52 r270
  text "3V3" at 123.8,107.8 h1.52 r270
  text "5V" at 126.3,107.8 h1.52 r270
  text "GND" at 128.9,107.8 h1.52 r270
  text "GND" at 131.4,107.8 h1.52 r270
  text "5V" at 133.9,107.8 h1.52 r270
Mechanical 1:
  circle w0.013: c103.73,154.28 r1.587
  circle w0.013: c154.53,139.04 r1.587
  circle w0.013: c154.53,111.1 r1.587
  circle w0.013: c102.43,106.02 r1.587
  circle w0.013: c151.96,106.02 r0.254
  circle w0.013: c149.42,106.02 r0.254
  circle w0.013: c146.88,106.02 r0.254
  circle w0.013: c144.34,106.02 r0.254
  circle w0.013: c141.8,106.02 r0.254
  circle w0.013: c139.26,106.02 r0.254
  circle w0.013: c134.18,106.02 r0.254
  circle w0.013: c131.64,106.02 r0.254
  circle w0.013: c129.1,106.02 r0.254
  circle w0.013: c126.56,106.02 r0.254
  circle w0.013: c124.02,106.02 r0.254
  circle w0.013: c121.48,106.02 r0.254
  circle w0.013: c118.94,106.02 r0.254
  circle w0.013: c116.4,106.02 r0.254
  circle w0.013: c151.96,154.28 r0.254
  circle w0.013: c149.42,154.28 r0.254
  circle w0.013: c146.88,154.28 r0.254
  circle w0.013: c144.34,154.28 r0.254
  circle w0.013: c141.8,154.28 r0.254
  circle w0.013: c139.26,154.28 r0.254
  circle w0.013: c136.72,154.28 r0.254
  circle w0.013: c134.18,154.28 r0.254
  circle w0.013: c130.146,154.28 r0.254
  circle w0.013: c127.606,154.28 r0.254
  circle w0.013: c125.066,154.28 r0.254
  circle w0.013: c122.526,154.28 r0.254
  circle w0.013: c119.986,154.28 r0.254
  circle w0.013: c117.446,154.28 r0.254
  circle w0.013: c114.906,154.28 r0.254
  circle w0.013: c112.366,154.28 r0.254
  circle w0.013: c109.826,154.28 r0.254
  circle w0.013: c107.286,154.28 r0.254
  lines w0.013: 121.56,156.9 121.56,103.38 154.5,103.38 ; 151.965,157.358 153.53,155.794 153.53,144.366 ; 152.965,156.858 88.46,156.858 88.46,103.48 154.53,103.48 154.53,106.02 157.01,108.56 157.01,141.326 154.53,143.866
Board Outline (M30):
  the board outline again, w0.1